# Altium PCB Youtube_Top_2.PcbDoc
Units mm, origin at the board's own origin, x right, y up, seen from the top; angles counter-clockwise.
Board outline 54 x 30 mm, 2 copper layers (Top Layer, Bottom Layer); 9 components, 4 nets, 31 pads, 0 vias.
Unrouted connection lines stored in the file: 4.
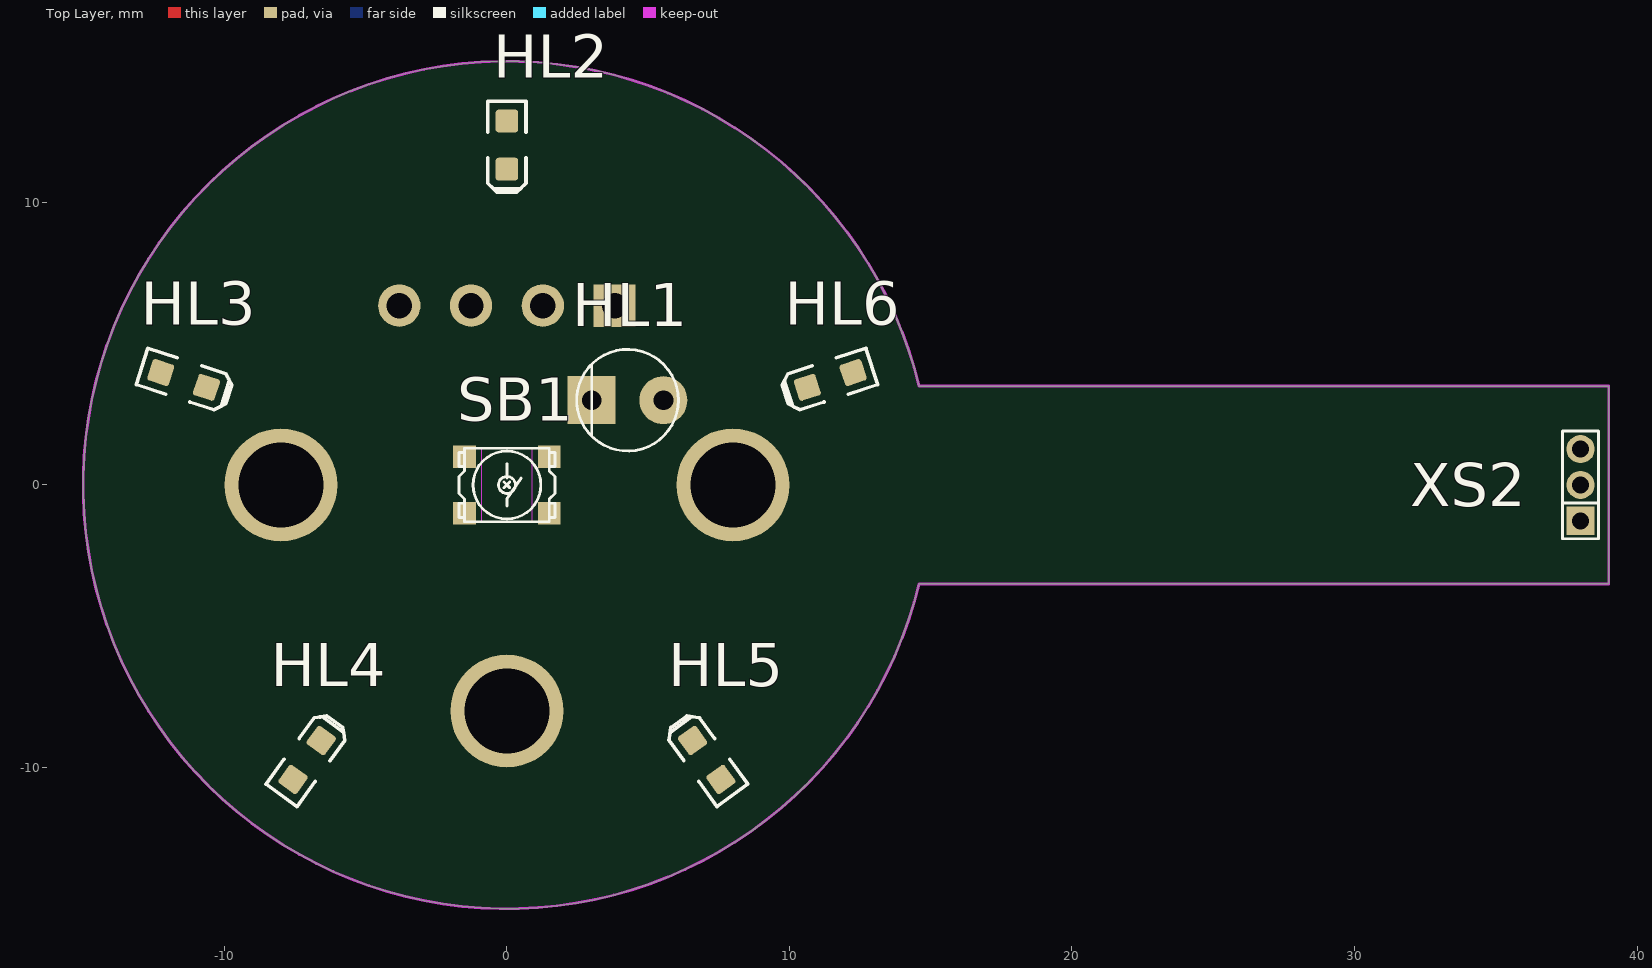
[diagram p0: Top Layer view]
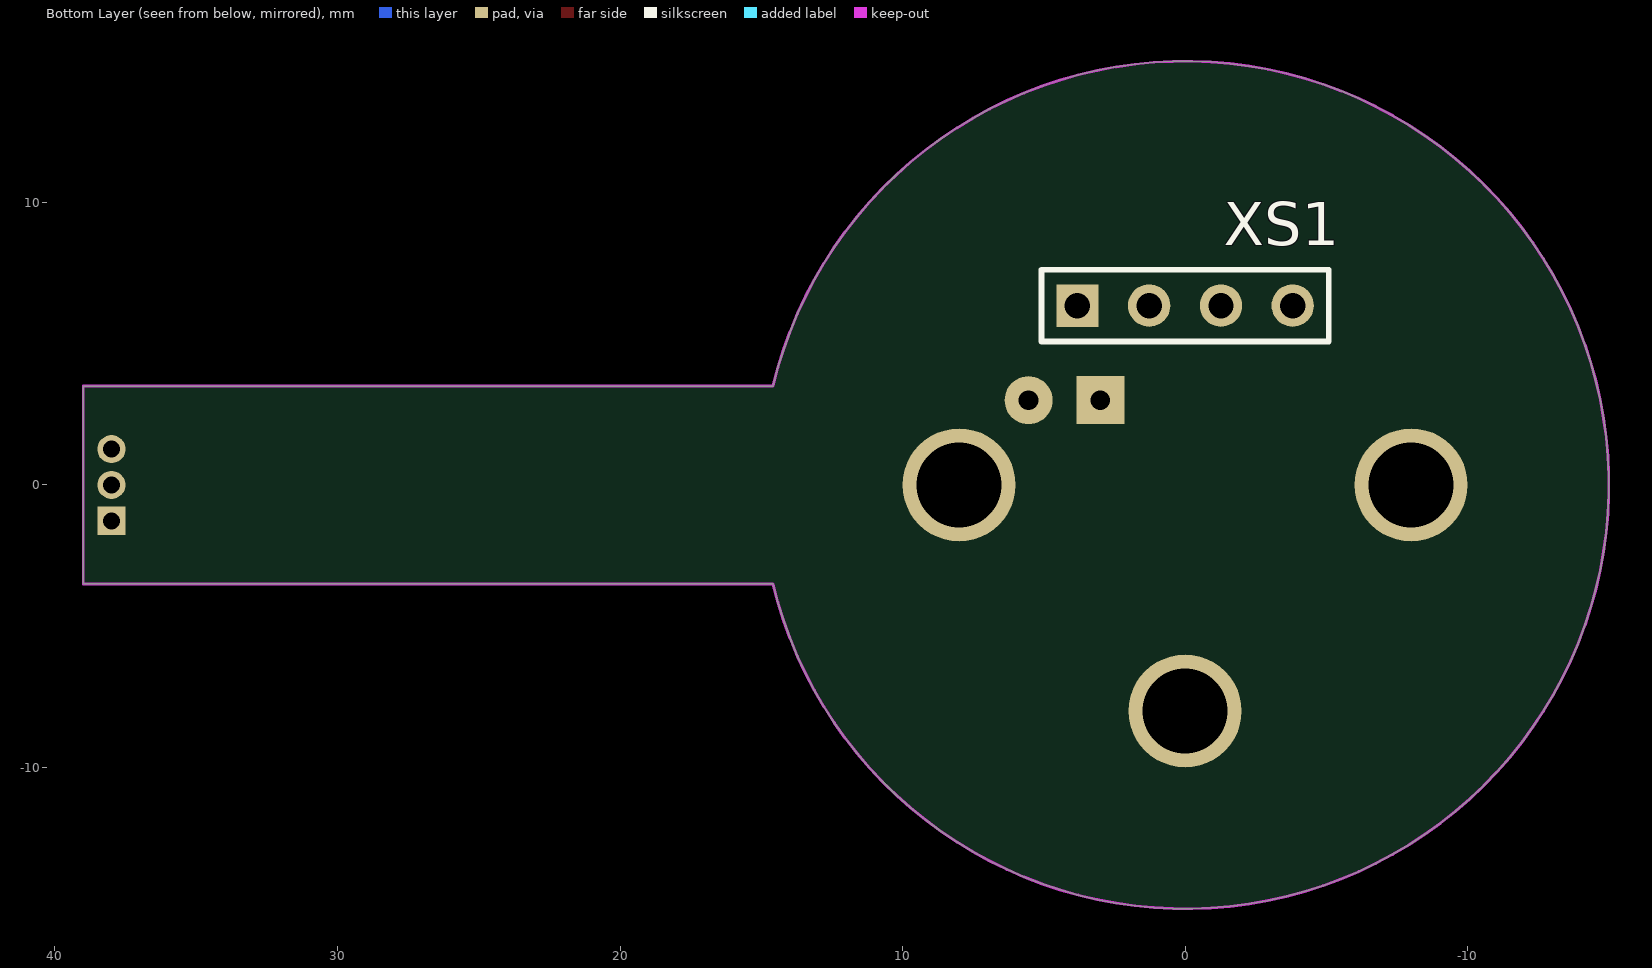
[diagram p1: Bottom Layer view, seen from below]

## Layer stack, top to bottom
Top Solder: solder mask 0.0102, Solder Resist, Dk 3.5
Top Layer: signal copper 0.0356
Dielectric 1: dielectric 0.32, FR-4, Dk 4.8
Bottom Layer: signal copper 0.0356
Bottom Solder: solder mask 0.0102, Solder Resist, Dk 3.5

## Board outline
14.586,-3.5 cw(c0,0) 14.586,3.5 39,3.5 39,-3.5
board region "Layer Stack Region_Rigid": 14.532,-3.724 14.445,-4.089 14.068,-5.241 13.599,-6.358 13.042,-7.434 12.401,-8.461 11.678,-9.434 10.879,-10.345 10.01,-11.188 9.075,-11.959 8.081,-12.652 7.034,-13.262 5.942,-13.786 4.811,-14.22 3.649,-14.562 2.463,-14.809 1.26,-14.959 0.05,-15.012 -1.161,-14.967 -2.364,-14.825 -3.552,-14.586 -4.716,-14.252 -5.85,-13.826 -6.946,-13.309 -7.996,-12.705 -8.995,-12.019 -9.935,-11.255 -10.81,-10.417 -11.615,-9.511 -12.344,-8.544 -12.993,-7.521 -13.557,-6.448 -14.033,-5.334 -14.417,-4.185 -14.708,-3.009 -14.902,-1.813 -15,-0.606 -15,0.606 -14.902,1.813 -14.708,3.009 -14.417,4.185 -14.033,5.334 -13.557,6.448 -12.993,7.521 -12.344,8.544 -11.615,9.511 -10.81,10.417 -9.935,11.255 -8.995,12.019 -7.996,12.705 -6.946,13.309 -5.85,13.825 -4.716,14.252 -3.552,14.586 -2.364,14.825 -1.161,14.967 0.05,15.012 1.26,14.959 2.463,14.809 3.649,14.562 4.811,14.22 5.942,13.786 7.034,13.262 8.081,12.652 9.075,11.959 10.01,11.188 10.879,10.345 11.678,9.434 12.401,8.461 13.042,7.434 13.599,6.358 14.068,5.24 14.418,4.171
board region "Layer Stack Region_Flex": 14.418,4.171 14.445,4.089 14.586,3.5 39,3.5 39,-3.5 14.586,-3.5 14.532,-3.724

## Design rules (kind name [scope] priority, off if disabled: settings)
Clearance [All] p1: gap=0.254 ignorepadtopadclearanceinfootprint=FALSE except(0: Arc-Hole Track-Hole SMDPad-Hole THPad-Hole Via-Hole Fill-Hole Poly-Hole Region-Hole Text-Hole)
PolygonConnect [All] p1: connectstyle=Relief reliefconductorwidth=0.254 reliefentries=4 polygonreliefangle="90 Angle" airgapwidth=0.254
RoutingVias [All] p1: holewidth=0.711 width=1.27 viastyle="Through Hole" minholewidth=0.711 minwidth=1.27 maxholewidth=0.711 maxwidth=1.27
SolderMaskExpansion [All] p1: expansion=0.102 istentingtop=FALSE
Width [All] p1: maxlimit=0.254 minlimit=0.254 preferedwidth=0.254
30 further rules are at their usual default settings.

## Components (designator, comment, footprint, x,y, rotation, side; value= is the part's Value field where it differs from the comment)
HL1 "FYL-5013 GD" LED_3MM_GREEN 3,3 r0 top
HL2 "RD 0603" LED-0603-RED 0,12.032 r270 top
HL3 "RD 0603" LED-0603-RED -11.443,3.718 r342 top
HL4 "RD 0603" LED-0603-RED -7.072,-9.734 r54 top
HL5 "RD 0603" LED-0603-RED 7.072,-9.734 r126 top
HL6 "RD 0603" LED-0603-RED 11.443,3.718 r198 top
SB1 "TL3700AF160QG" TL3700AF160QG 0,0 r0 top
XS1 "PBS-4" PBS-4-3D 3.81,6.35 r180 bottom
XS2 "M50-3030342" PBLS-1.27-3 38,-1.27 r0 top

## Footprints (in the part's own frame and the unit in brackets; to place one, negate y for a bottom-side part, rotate by r counter-clockwise, add the part's x,y. Pads: shape width x height; smd on the part's side, far side on the other; paste and mask are expansions set on the pad)
LED-0603-RED [mm]
  round 0.254 on Mech15: 0(0,0)
  rrect25% 0.8x0.8 smd: A(-0.85,0) K(0.85,0)
  Top Layer pour cut-out: -0.5,0.5 0.5,0.5 0.5,-0.5 -0.5,-0.5
  silkscreen extent -1.55,-0.68 1.68,0.67, body extent -0.8,-0.4 0.8,0.4, height 0.75
LED_3MM_GREEN [mm]
  rect 1.7x1.7 hole 0.7: 1(0,0)
  round 1.7 hole 0.7: 2(2.54,0)
  silkscreen extent -0.53,-1.8 3.07,1.8, body extent -0.39,-1.65 2.91,1.65, height 5.51
PBLS-1.27-3 [mm]
  rect 1x1 hole 0.6: 1(0,0)
  round 1 hole 0.6: 2(0,1.27) 3(0,2.54)
  silkscreen extent -0.64,-0.64 0.64,3.17
PBS-4-3D [mm] "Connector; Header; 4 Position"
  rect 1.5x1.5 hole 0.9: 1(0,0)
  round 1.5 hole 0.9: 2(2.54,0) 3(5.08,0) 4(7.62,0)
  silkscreen extent -1.27,-1.27 8.89,1.27, body extent -1.27,-1.27 8.89,1.27, height 8.5
TL3700AF160QG [mm] "SWITCH TACTILE SPST-NO 0.02A 15V"
  rect 0.8x0.8 smd: 1(-1.5,1) 2(1.5,1) 3(-1.5,-1) 4(1.5,-1)
  Top Layer keep-out region: -0.9,-1.3 0.9,-1.3 0.9,1.3 -0.9,1.3
  silkscreen extent -1.7,-1.3 1.7,1.3, body extent -1.7,-1.3 1.7,1.3, height 0.65

## Part data
HL2 HL3 HL4 HL5 HL6: library part 150060RS55040, "LED RED DIFFUSED 0603 SMD", Digi-Key Part Number=732-12015-1-ND, HelpURL=https://www.digikey.com/products/en?keywords=732-12015-1-ND, Manufacturer Part Number=150060RS55040, Part Number=150060RS55040, Price$=0.17
SB1: "SWITCH TACTILE SPST-NO 0.02A 15V", Digi-Key Part Number=EG4919CT-ND, HelpURL=https://www.digikey.com/product-detail/en/e-switch/TL3700AF160QG/EG4919CT-ND/2538592, Part Number=TL3700AF160QG
XS1: library part M20-7820442, "Headers & Wire Housings 4 PIN SIL VERTICAL SOCKET GOLD+TIN", Mouser Part Number=855-M20-7820442, Package="Header 4POS 2.54mm", HelpURL=https://www.mouser.co.uk/ProductDetail/Harwin/M20-7820442?qs=vF78I%252BjhbY9ZgDLCXkGx4w%3D%3D, Manufacturer Part Number=M20-7820442, Part Number=M20-7820442, System=Connector
XS2: "Headers & Wire Housings 3 WAY SIL VERT PC TAIL SKT", Mouser Part Number=855-M50-3030342, HelpURL=https://eu.mouser.com/ProductDetail/Harwin/M50-3030342?qs=sGAEpiMZZMs%252BGHln7q6pm8Vn94ktop%2FJCT2ZrMcJQ%2F%2FaTd%2FpiUltJA%3D%3D, Manufacturer Part Number=M50-3030342, Part Number=M50-3030342, Price$=0.306
HL1: Part Number="FYL-5013 GD"

## Free pads (board coordinates)
  round 4 hole 3: 0(-8,0) 0(0,-8) 0(8,0)

## Nets (pads, with @x,y where several pads share a name; then routed paths per layer and width w, separated by ;. In a path a pad name is that pad's centre, name@x,y a point inside that pad or via, vN(x,y) a via of type N, cw(c..) or ccw(c..) an arc to the next point about the centre after c; other vN are vias at no path point)
circuit1: SB1.1 XS1.3
circuit2: SB1.3 XS1.4
GND: HL1.2 XS1.2
VCC: HL1.1 XS1.1
pads on no net: HL2.0 HL2.A HL2.K HL3.0 HL3.A HL3.K HL4.0 HL4.A HL4.K HL5.0 HL5.A HL5.K HL6.0 HL6.A HL6.K SB1.2 SB1.4 XS2.1 XS2.2 XS2.3

## Keep-outs
Keep-Out Layer:
  the board outline again, w0.1

## Silkscreen, mask and mechanical layers (free items; w line width, h text height)
Mechanical 15:
  circle w0.1: c0,0 r12
  lines w0.1: 3.31,5.85 4.31,6.85 ; 3.31,6.85 4.31,5.85